# Altium PCB ADC_UART_RX_V1.PcbDoc
Units mm, origin at the board's own origin, x right, y up, seen from the top; angles counter-clockwise.
Board outline 13.93 x 19 mm, 2 copper layers (Top Layer, Bottom Layer); 6 components, 6 nets, 32 pads, 0 vias.
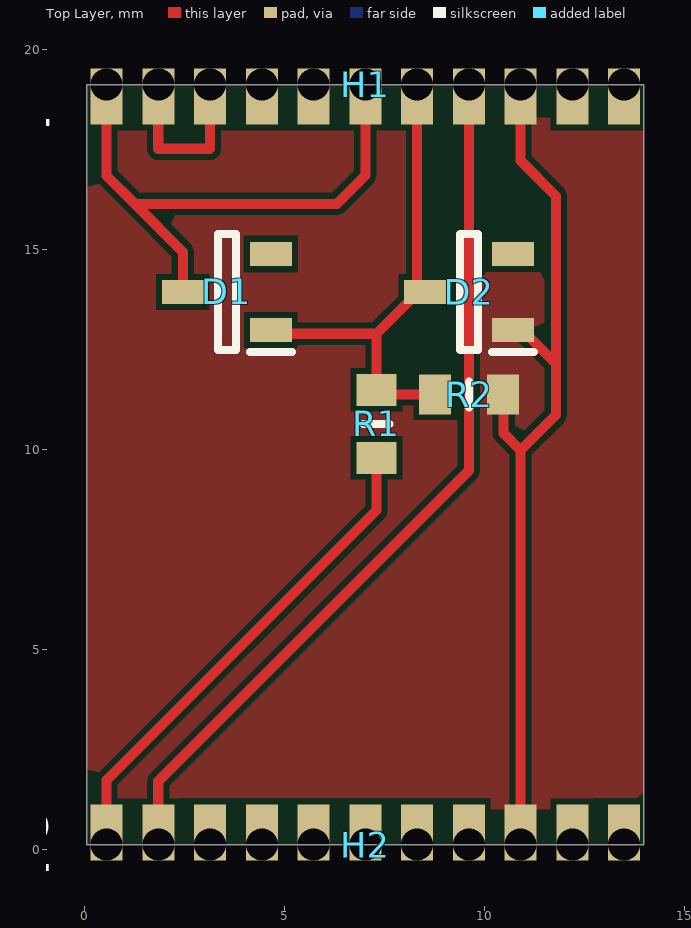
[diagram p0: Top Layer view]
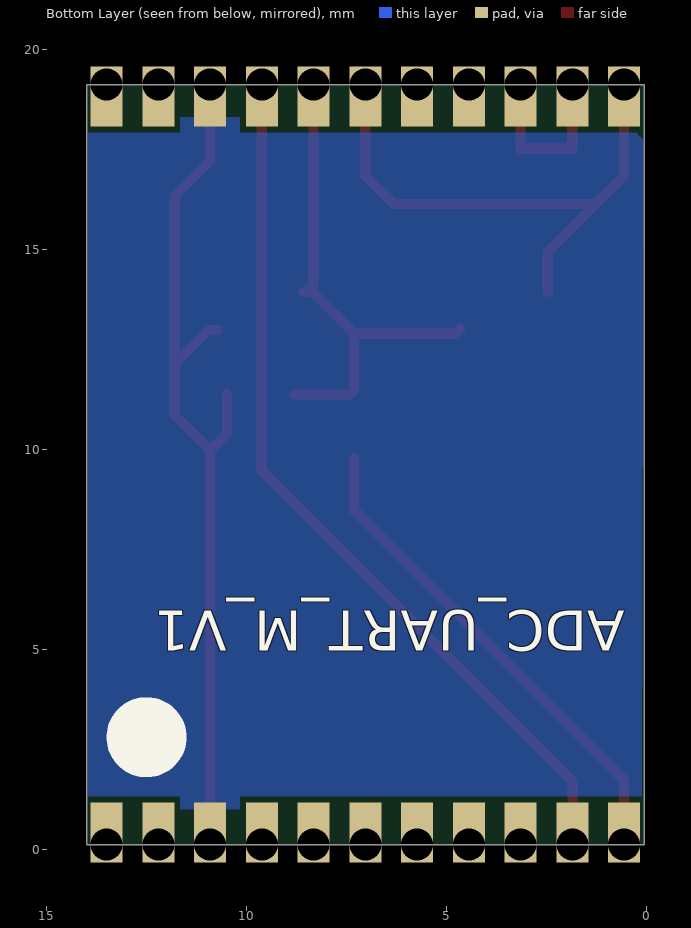
[diagram p1: Bottom Layer view, seen from below]

## Layer stack, top to bottom
Top Solder: solder mask 0.0102, Solder Resist, Dk 3.5
Top Layer: signal copper 0.0356
Dielectric 1: dielectric 0.32, FR-4, Dk 4.8
Bottom Layer: signal copper 0.0356
Bottom Solder: solder mask 0.0102, Solder Resist, Dk 3.5

## Board outline
0.06,0.13 0.06,19.13 13.994,19.13 13.994,0.13

## Design rules (kind name [scope] priority, off if disabled: settings)
AssemblyTestPointUsage SilkToBoardRegionClearance_1 [All] p2:
AssemblyTestPointUsage SilkToBoardRegionClearance [All] p3:
Clearance [All] p1: gap=0.152 ignorepadtopadclearanceinfootprint=FALSE except(0: Arc-Hole Track-Hole SMDPad-Hole THPad-Hole Via-Hole Fill-Hole Poly-Hole Region-Hole Text-Hole)
HoleSize [All] p1: absolutevalues=TRUE maxlimit=6.35 minlimit=0.3 maxpercent=80.000 minpercent=20.000
MatchedLengths DiffPair_DIFF100MatchedLengths [InDifferentialPairClass('DIFF100')] p1: tolerance=0.152 checknetsindiffpair=TRUE checkdiffpairvsdiffpair=FALSE checkxsignals=FALSE checkothers=FALSE usedelayunits=FALSE
MinimumSolderMaskSliver [All] p1: minsoldermaskwidth=0.1
MinimumSolderMaskSliver SilkscreenOverComponentPads_2 [All] p2: minsoldermaskwidth=0.254
MinimumSolderMaskSliver SilkToSolderMaskClearance_1 [IsPad] p3: minsoldermaskwidth=0.254
MinimumSolderMaskSliver SilkscreenOverComponentPads_1 [All] p4: minsoldermaskwidth=0.254
MinimumSolderMaskSliver SilkToSolderMaskClearance [IsPad] p5: minsoldermaskwidth=0.254
MinimumSolderMaskSliver SilkscreenOverComponentPads [All] p6: minsoldermaskwidth=0.254
PolygonConnect [All] p1: connectstyle=Direct reliefconductorwidth=0.254 reliefentries=4 polygonreliefangle="90 Angle" airgapwidth=0.254
RoutingVias [All] p1: holewidth=0.305 width=0.635 viastyle="Through Hole" minholewidth=0.305 minwidth=0.635 maxholewidth=0.711 maxwidth=1.27
SilkToBoardRegionClearance SilkToBoardRegionClearance_2 [All] p1:
SilkToSolderMaskClearance SilkToSolderMaskClearance_2 [IsPad] p1: minsilkscreentomaskgap=0.254 clearancetoexposedcopper=TRUE
SolderMaskExpansion [All] p1: expansion=0.102
Width [All] p1: maxlimit=2.54 minlimit=0.152 preferedwidth=0.254
26 further rules are at their usual default settings.

## Components (designator, comment, footprint, x,y, rotation, side; value= is the part's Value field where it differs from the comment)
D1 "BAT54C,215" SOT95P230X110-3N 3.567,13.946 r180 top
D2 "BAT54C,215" SOT95P230X110-3N 9.626,13.946 r180 top
H1 "CASTELLATED 11 pin" "CASTELLATED 11 pin" 13.498,19.13 r180 top locked
H2 "CASTELLATED 11 pin" "CASTELLATED 11 pin" 0.56,0.13 r0 top locked
R1 "MCT06030C1001FP500" RESC1608X55N 7.308,10.647 r270 top
R2 "MCT06030C1001FP500" RESC1608X55N 9.626,11.386 r180 top

## Footprints (in the part's own frame and the unit in brackets; to place one, negate y for a bottom-side part, rotate by r counter-clockwise, add the part's x,y. Pads: shape width x height; smd on the part's side, far side on the other; paste and mask are expansions set on the pad)
"CASTELLATED 11 pin" [mm]
  rect 0.8x1.4 / inner rect 0.8x1.5 / far side rect 0.8x1.5 hole 0.8 copper offset 0,0.3: 1(0,0) 2(1.294,0) 3(2.587,0) 4(3.881,0) 5(5.175,0) 6(6.469,0) 7(7.762,0) 8(9.056,0) 9(10.35,0) 10(11.644,0) 11(12.938,0)
RESC1608X55N [mm]
  rect 0.8x1 smd: 1(-0.85,0) 2(0.85,0)
  silkscreen extent 0,-0.33 0,0.33, body extent -0.8,-0.43 0.8,0.43, height 0.55
SOT95P230X110-3N [mm]
  rect 1.05x0.6 smd: 1(-1.1,0.95) 2(-1.1,-0.95) 3(1.1,0)
  silkscreen extent -1.63,-1.45 0.23,1.5, body extent -1.2,-1.45 1.2,1.45, height 0.95

## Part data
D1 D2: "Diode", Manufacturer_Name=Nexperia, Mouser2 Part Number=771-BAT54C-T/R, Datasheet Link=https://componentsearchengine.com//BAT54C,215.pdf, Height=1.1mm, Manufacturer_Part_Number=BAT54C,215, Mouser2 Price/Stock=https://www.mouser.com/Search/Refine.aspx?Keyword=771-BAT54C-T%2FR
R1 R2: "Resistor", Manufacturer_Name=Vishay, Datasheet Link=http://www.vishay.com/docs/28705/mcx0x0xpro.pdf, Height=0.55mm, Manufacturer_Part_Number=MCT06030C1001FP500

## Nets (pads, with @x,y where several pads share a name; then routed paths per layer and width w, separated by ;. In a path a pad name is that pad's centre, name@x,y a point inside that pad or via, vN(x,y) a via of type N, cw(c..) or ccw(c..) an arc to the next point about the centre after c; other vN are vias at no path point)
+3.3: D1.3 H1.6 H1.11 | length 14.3
  Top Layer w0.254: H1.11 0.56,16.851 1.263,16.148 ; D1.3 2.467,14.944 1.263,16.148 ; H1.6 7.03,16.858 6.32,16.148 3.029,16.148 1.263,16.148
ADC: H2.1 R1.2 | length 12.5
  Top Layer w0.254: H2.1 0.56,1.739 7.308,8.487 R1.2
ADC_CALIBRATED: D1.1 D2.3 H1.5 R1.1 R2.2 | length 12.6
  Top Layer w0.254: D1.1@4.667,13.014 4.781,12.9 7.308,12.9 ; H1.5 8.323,14.119 D2.3@8.496,13.946 ; D2.3@8.579,13.946 D2.3 D2.3@8.496,13.946 ; R2.2@8.8,11.384 7.421,11.384 R1.1 7.308,12.9 ; 7.308,12.9 8.354,13.946 D2.3@8.496,13.946
D2: H1.9 H1.10 | length 4.5
  Top Layer w0.254: H1.10 1.854,17.525 3.148,17.525 H1.9
D3: H1.4 H2.2 | length 22.2
  Top Layer w0.254: H2.2 1.854,1.715 9.617,9.478 H1.4
GND: D2.1 H1.3 H2.9 R2.1 | length 22.7
  Top Layer w0.254: R2.1@10.492,11.389 10.487,11.384 10.487,10.41 10.91,9.987 ; D2.1 10.951,12.996 11.792,12.155 ; H2.9 10.91,9.987 ; H1.3 10.911,17.227 11.792,16.346 11.792,12.155 ; 10.91,9.987 11.792,10.869 11.792,12.155
pads on no net: D1.2 D2.2 H1.1 H1.2 H1.7 H1.8 H2.3 H2.4 H2.5 H2.6 H2.7 H2.8 H2.10 H2.11

## Polygon pours and split planes (outlines as drawn)
no net on Bottom Layer "Bottom Layer-No Net" (solid, pour order 10): -0.55,20.155
GND on Bottom Layer "Bottom Layer-GND" (solid, pour order 8): 0.078,18.31 13.959,18.31 13.959,1.016 0.12,1.016
no net on Bottom Layer "NONET_L02_P000" (solid, pour order 0): 0.314,18.291
GND on Top Layer "Top Layer-GND" (solid, pour order 12): 0.063,18.305 13.993,18.305 13.995,1.017 0.06,1.017

## Silkscreen, mask and mechanical layers (free items; w line width, h text height)
Bottom Overlay:
  circle w1: c12.499,2.813 r0.5
  text "ADC_UART_M_V1" at 0.545,5.969 h1 r180
Mechanical 1:
  pour cut-out: 5.399,12.138
  lines w0.2: 13.994,0.13 13.994,19.13 ; 13.994,0.13 0.06,0.13 0.06,19.13 13.994,19.13